# EAGLE board ESPFA (EAGLE 9.6.1)
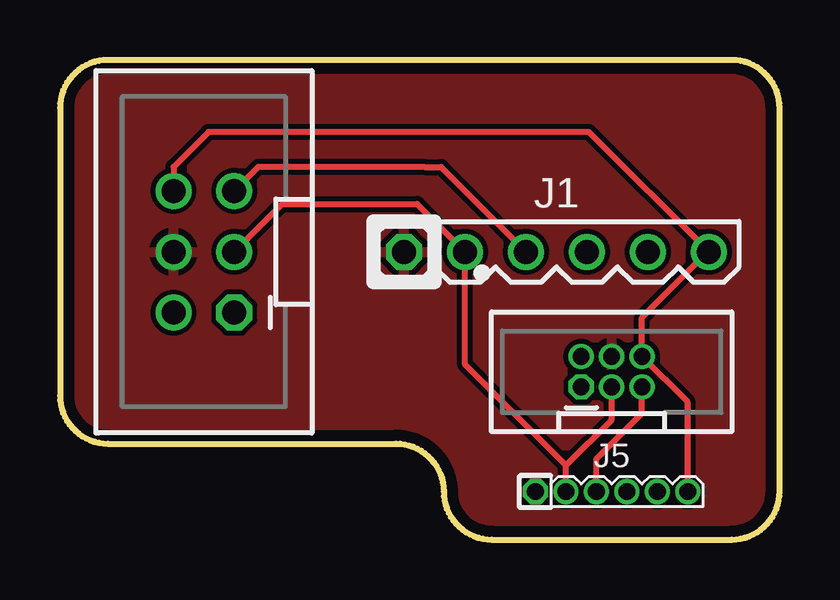
[diagram p0: board, top side]
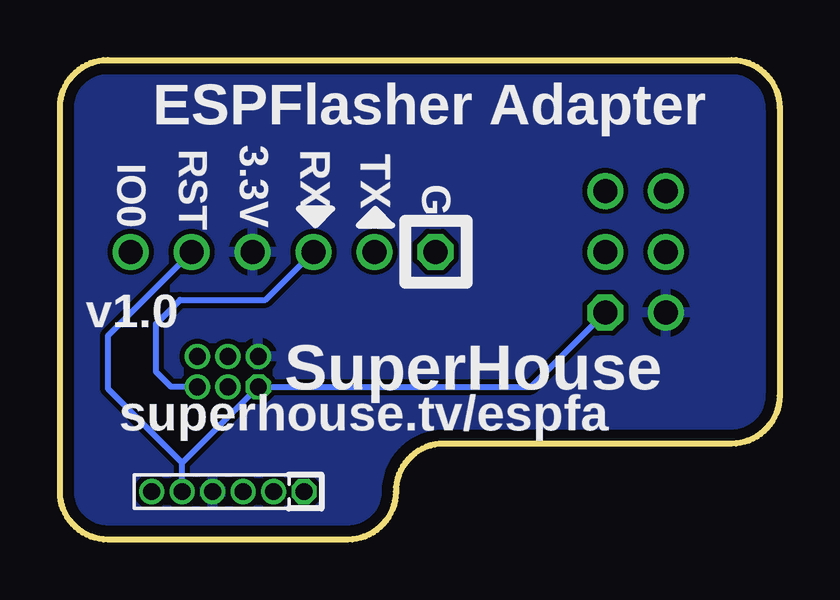
[diagram p1: board, bottom side, seen from below]

Size 30 x 20 mm. Coordinates in mm from the lower left corner, seen from the top.
Outline: 30,2 30,18 arc90 28,20 2,20 arc90 0,18 0,6 arc90 2,4 14,4 arc-90 16,2 arc90 18,0 28,0 arc90 30,2
Copper layers (1*16): Top 0.035mm / dielectric 1.5mm / Bottom 0.035mm
Design rules "SuperHouse-Design-Rules": minimum track width 10mil, minimum drill 24mil, track to track 8mil, track to pad 8mil, pad to pad 8mil, via to via 8mil, smd to smd 6mil, copper to edge 18mil, drill to drill 8mil, minimum pad ring 7mil, minimum via ring 8mil, stop-mask expansion 4mil, vias tented up to drill 0.5mm, thermal gap 10mil
Net classes: 0 default: width 0.152 mm, drill 0.241 mm, clearance 0.152 mm

## Footprints (pad centres in the part's own frame; a part is rotated, then mirrored left to right if it is on the bottom)
1X6-2.54-SOCKET-RA = drill 1 octagon: 1 -6.35,0 | drill 1: 2 -3.81,0; 3 -1.27,0; 4 1.27,0; 5 3.81,0; 6 6.35,0
2X3-1.27-SHROUDED = drill 0.7 pad 1.016 octagon: 1 -1.27,-0.635 | drill 0.7 pad 1.016: 2 -1.27,0.635; 3 0,-0.635; 4 0,0.635; 5 1.27,-0.635; 6 1.27,0.635
2X3-2.54-SHROUDED = drill 1 octagon: 1 -2.54,-1.27 | drill 1: 2 -2.54,1.27; 3 0,-1.27; 4 0,1.27; 5 2.54,-1.27; 6 2.54,1.27
1X6-1.27-PINS-RA = drill 0.7 pad 1.016 octagon: 1 -3.175,0 | drill 0.7 pad 1.016: 2 -1.905,0; 3 -0.635,0; 4 0.635,0; 5 1.905,0; 6 3.175,0

## Placement (x,y rotation side)
J1  ESP-PROG-1X6-2.54-SOCKET-RA  [1X6-2.54-SOCKET-RA]  20.7,12 0 top
J2  ESP-PROG-2X3-1.27-SHROUDED  [2X3-1.27-SHROUDED]  23,7 0 top
J4  ESP-PROG-2X3-2.54-SHROUDED  [2X3-2.54-SHROUDED]  6,12 90 top
J5  ESP-PROG-1X6-1.27-PINS-RA  [1X6-1.27-PINS-RA]  23,2 0 top

## Library data of the parts
J1 J2 J4 J5 = SuperHouse-ESP-Prog

## Nets
3.3V: J1.4 J2.2 J4.2 J5.4
CH_EN: J1.5 J2.1 J4.1 J5.5
ESP_RX: J1.3 J2.5 J4.5 J5.3
ESP_TX: J1.2 J2.3 J4.3 J5.2
GND: J1.1 J2.4 J4.4 J5.1
GPIO0: J1.6 J2.6 J4.6 J5.6

## Tracks (layer width: path | path; a pad name or v marks a point on that pad's centre or on a via)
3.3V
  pour Bottom: 0,18 arc-90 2,20 28,20 arc-90 30,18 30,2 arc-90 28,0 18,0 arc-90 16,2 arc90 14,4 2,4 arc-90 0,6
CH_EN
  Bottom 0.254: J5.5 24.91,3.19 | 24.91,3.19 J2.1 10.37,6.37 J4.1 | 24.91,3.19 28,6.29 28,8.51 J1.5
ESP_RX
  Top 0.254: J5.3 22.36,3.37 24.27,5.27 J2.5 | J4.5 8.27,15.54 15,15.54 15.19,15.54 15.89,15.54 J1.3
  Bottom 0.254: J2.5 25.36,6.37 26,7 26,9 25,10 21.43,10 J1.3
ESP_TX
  Top 0.254: J5.2 21.09,3.1 | J2.3 23,5 21.09,3.1 | J4.3 9.27,14 14.89,14 J1.2 16.89,7.3 21.09,3.1
GND
  pour Top: 0,18 arc-90 2,20 28,20 arc-90 30,18 30,2 arc-90 28,0 18,0 arc-90 16,2 arc90 14,4 2,4 arc-90 0,6
GPIO0
  Top 0.254: J4.6 4.73,15.54 6.19,17 22.05,17 27.02,12.03 | J5.6 26.18,5.73 J2.6 24.27,9.27 27.02,12.03 | 27.02,12.03 J1.6

## Text on the board
bPlace: ESPFlasher Adapter | G | TX | RX | 3.3V | RST | IO0 | v1.0 | SuperHouse | superhouse.tv/espfa
tValues: K | A | K | A | A | K